# EAGLE board 2013-09-26-antonio-feed-support-box-control-v1_0 (EAGLE 6.5.0), part 1 of 2
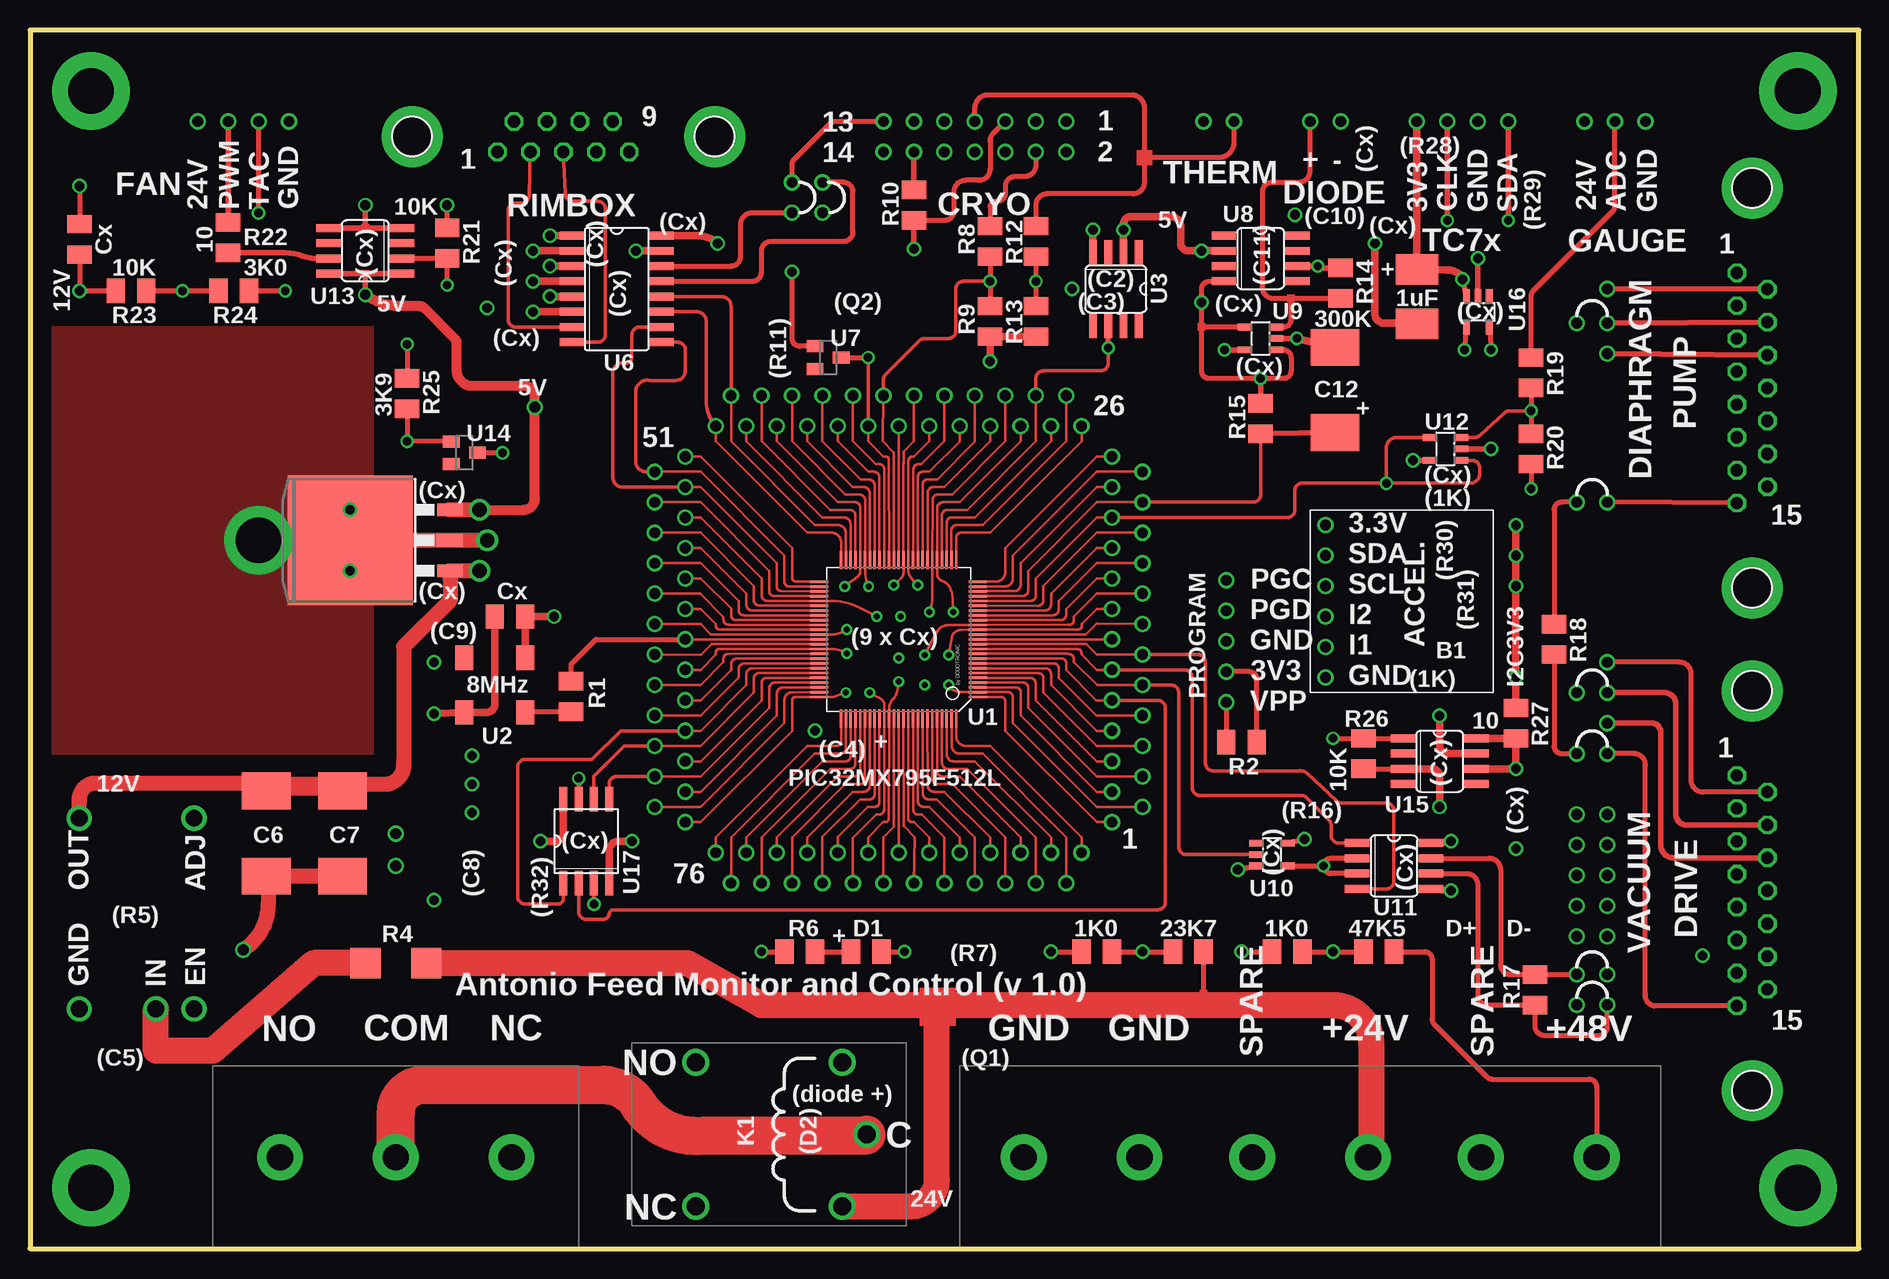
[diagram p0: board, top side]
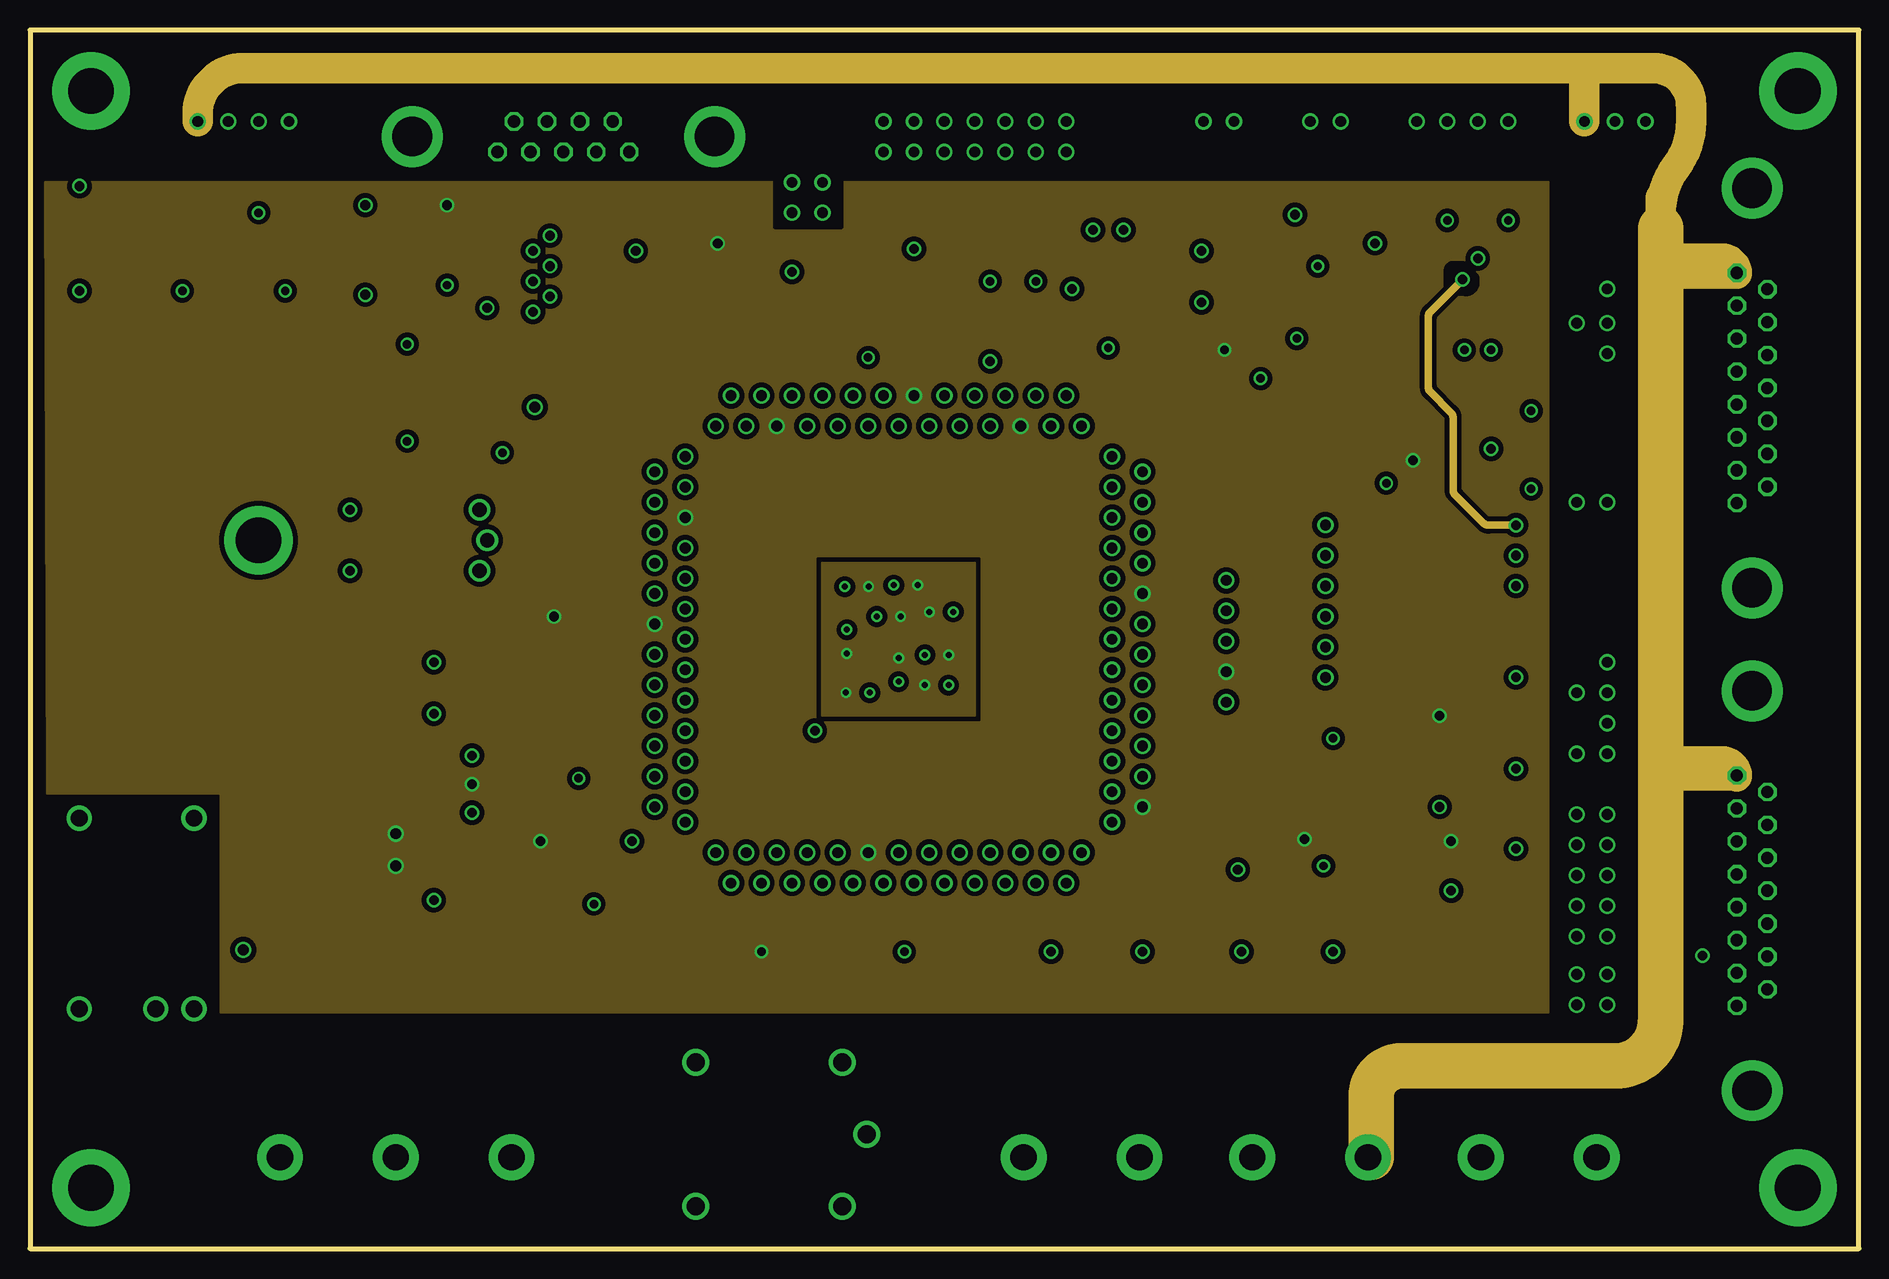
[diagram p1: board, inner layer Route2]
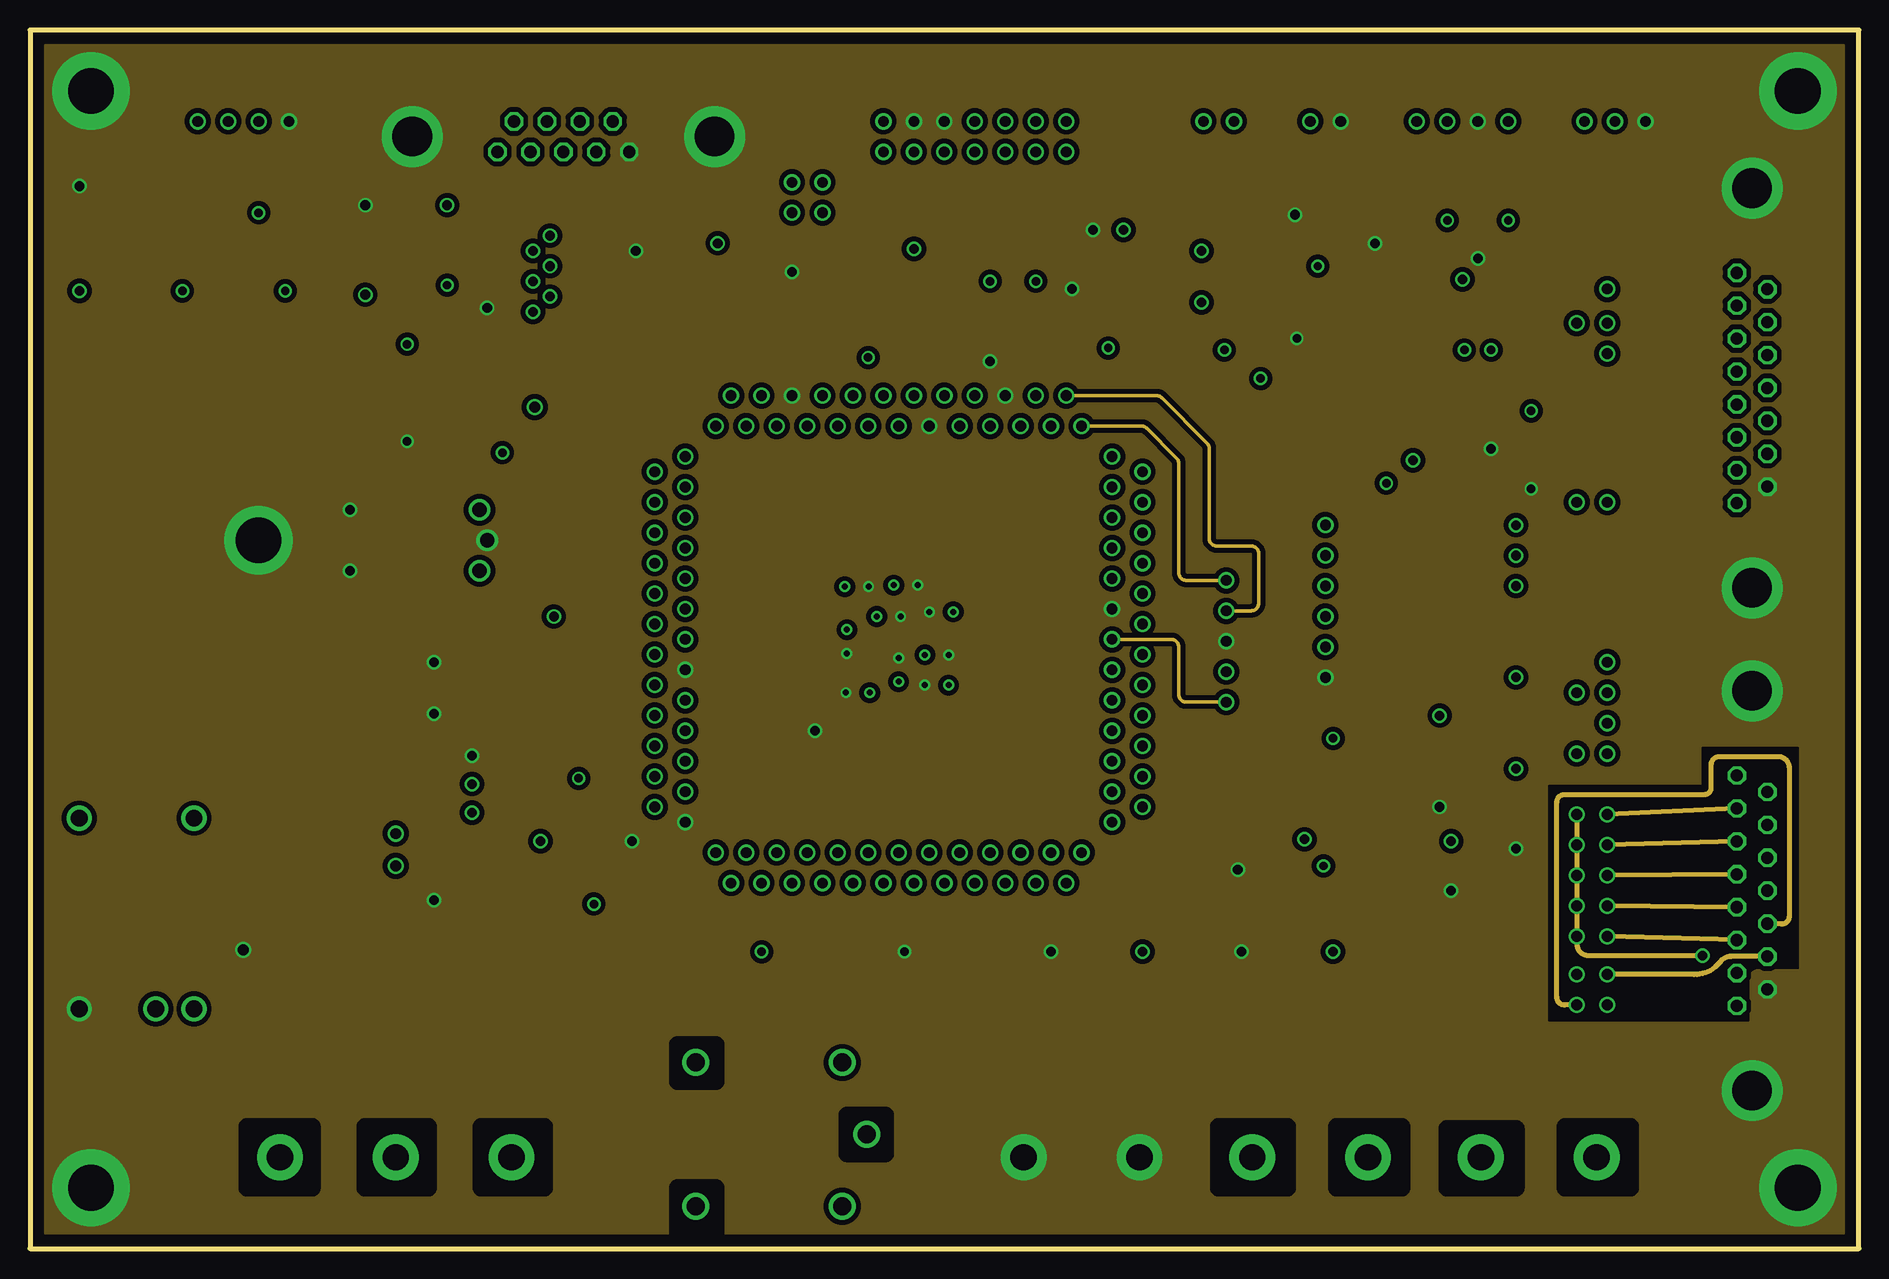
[diagram p2: board, inner layer Route15]
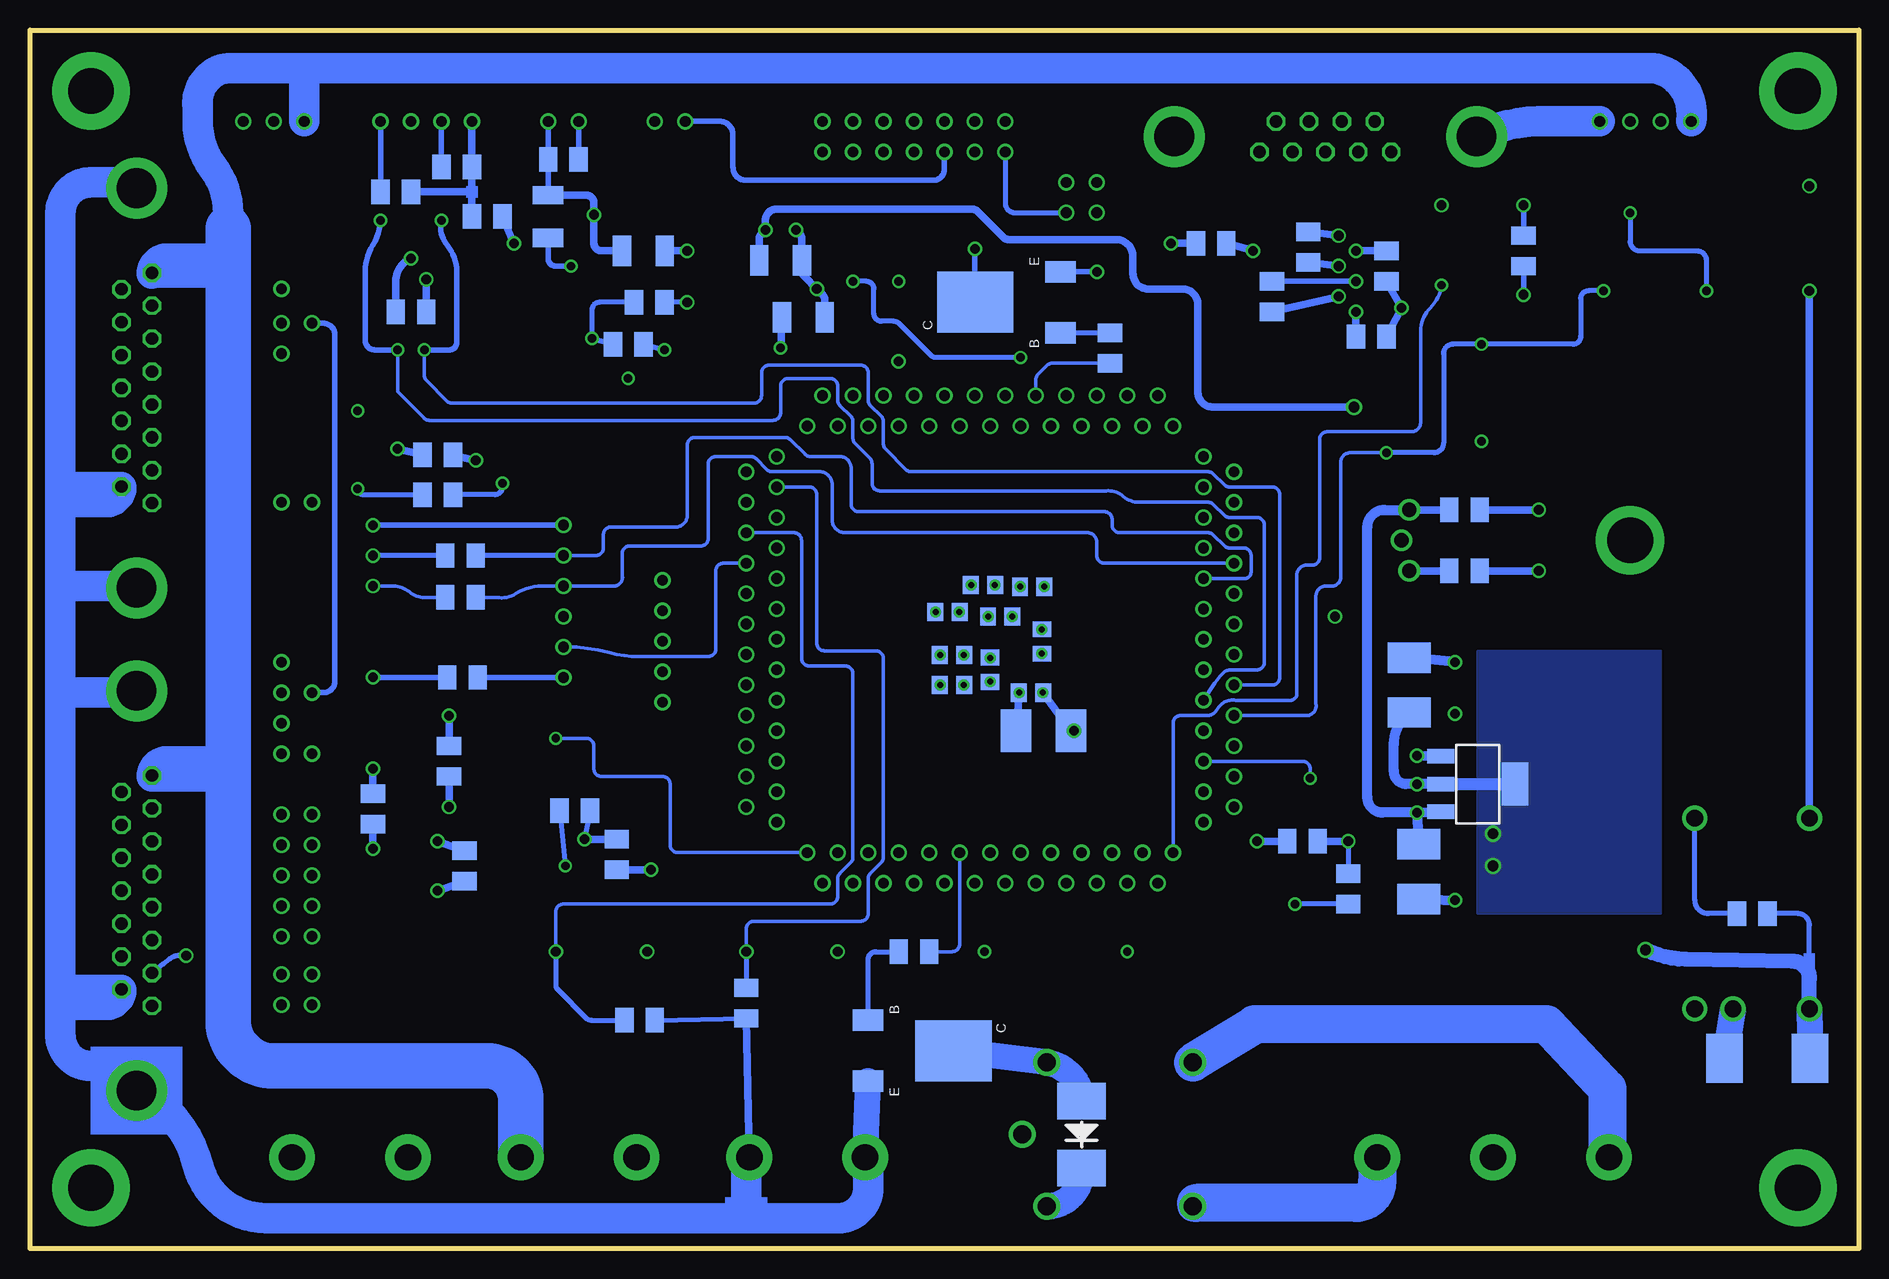
[diagram p3: board, bottom side, seen from below]

Size 152.4 x 101.6 mm. Coordinates in mm from the lower left corner, seen from the top.
Outline: 0,0 152.4,0 152.4,101.6 0,101.6 0,0
Copper layers (1+2*15+16): Top 0.0178mm / dielectric 12mil / Route2 0.0356mm / dielectric 28mil / Route15 0.0356mm / dielectric 12mil / Bottom 0.0178mm
Design rules "SSC-EAGLE-4Lyr_v1.0.0.3": minimum track width 6mil, minimum drill 8mil, track to track 6mil, track to pad 6mil, pad to pad 6mil, via to via 6mil, smd to smd 6mil, copper to edge 20mil, drill to drill 16mil, minimum pad ring 8mil, minimum via ring 8mil, stop-mask expansion 3mil, vias tented up to drill 0mil, thermal gap 10mil

## Footprints (pad centres in the part's own frame; a part is rotated, then mirrored left to right if it is on the bottom)
G5LE14RELAY = drill 1.5: P$1 -6.096,5.994; P$2 -6.096,-5.994; P$3 6.096,-5.994; P$4 6.096,5.994; P$5 -8.128,0
STANDARDMOUNTINGHOLE = drill 3.81 pad 6.452: P$1 0,0
D15 = drill 1.016 octagon: 1 -9.601,-1.27; 2 -6.858,-1.27; 3 -4.115,-1.27; 4 -1.372,-1.27; 5 1.372,-1.27; 6 4.115,-1.27; 7 6.858,-1.27; 8 9.601,-1.27; 9 -8.23,1.27; 10 -5.486,1.27; 11 -2.743,1.27; 12 0,1.27; 13 2.743,1.27; 14 5.486,1.27; 15 8.23,1.27 | drill 3.302 pad 5.08: G1 -16.662,0; G2 16.662,0
2X7HEADER = drill 0.9: P$1 0,1.27; P$2 0,-1.27; P$3 -2.54,-1.27; P$4 -2.54,1.27; P$5 -5.08,1.27; P$6 -5.08,-1.27; P$7 -7.62,-1.27; P$8 -7.62,1.27; P$9 2.54,1.27; P$10 2.54,-1.27; P$11 5.08,-1.27; P$12 5.08,1.27; P$13 7.62,1.27; P$14 7.62,-1.27
DB9 = drill 1.016 octagon: 3 -4.115,-1.27; 4 -1.372,-1.27; 5 1.372,-1.27; 6 4.115,-1.27; 10 -5.486,1.27; 11 -2.743,1.27; 12 0,1.27; 13 2.743,1.27; 14 5.486,1.27 | drill 3.302 pad 5.08: G1 -12.598,0; G2 12.598,0
1X4HEADER = drill 0.9: P$1 1.27,0; P$2 -1.27,0; P$3 -3.81,0; P$4 3.81,0
1X2HEADER = drill 0.9: P$1 -1.27,0; P$2 1.27,0
1X3HEADER = drill 0.9: P$1 0,0; P$2 -2.54,0; P$3 2.54,0
1X3BARRIER = drill 2.2 pad 3.81: P$1 0,0; P$2 9.652,0; P$3 -9.652,0
1X6BARRIER = drill 2.2 pad 3.81: P$1 4.826,0; P$2 -4.826,0; P$3 -14.224,0; P$4 -23.876,0; P$5 14.224,0; P$6 23.876,0
TQFP100_12X12 = smd 0.2 x 1.5: 1 -4.8,-6.6; 2 -4.4,-6.6; 3 -4,-6.6; 4 -3.6,-6.6; 5 -3.2,-6.6; 6 -2.8,-6.6; 7 -2.4,-6.6; 8 -2,-6.6; 9 -1.6,-6.6; 10 -1.2,-6.6; 11 -0.8,-6.6; 12 -0.4,-6.6; 13 0,-6.6; 14 0.4,-6.6; 15 0.8,-6.6; 16 1.2,-6.6; 17 1.6,-6.6; 18 2,-6.6; 19 2.4,-6.6; 20 2.8,-6.6; 21 3.2,-6.6; 22 3.6,-6.6; 23 4,-6.6; 24 4.4,-6.6; 25 4.8,-6.6; 51 4.8,6.6; 52 4.4,6.6; 53 4,6.6; 54 3.6,6.6; 55 3.2,6.6; 56 2.8,6.6; 57 2.4,6.6; 58 2,6.6; 59 1.6,6.6; 60 1.2,6.6; 61 0.8,6.6; 62 0.4,6.6; 63 0,6.6; 64 -0.4,6.6; 65 -0.8,6.6; 66 -1.2,6.6; 67 -1.6,6.6; 68 -2,6.6; 69 -2.4,6.6; 70 -2.8,6.6; 71 -3.2,6.6; 72 -3.6,6.6; 73 -4,6.6; 74 -4.4,6.6; 75 -4.8,6.6 | smd 1.5 x 0.2: 26 6.6,-4.8; 27 6.6,-4.4; 28 6.6,-4; 29 6.6,-3.6; 30 6.6,-3.2; 31 6.6,-2.8; 32 6.6,-2.4; 33 6.6,-2; 34 6.6,-1.6; 35 6.6,-1.2; 36 6.6,-0.8; 37 6.6,-0.4; 38 6.6,0; 39 6.6,0.4; 40 6.6,0.8; 41 6.6,1.2; 42 6.6,1.6; 43 6.6,2; 44 6.6,2.4; 45 6.6,2.8; 46 6.6,3.2; 47 6.6,3.6; 48 6.6,4; 49 6.6,4.4; 50 6.6,4.8; 76 -6.6,4.8; 77 -6.6,4.4; 78 -6.6,4; 79 -6.6,3.6; 80 -6.6,3.2; 81 -6.6,2.8; 82 -6.6,2.4; 83 -6.6,2; 84 -6.6,1.6; 85 -6.6,1.2; 86 -6.6,0.8; 87 -6.6,0.4; 88 -6.6,0; 89 -6.6,-0.4; 90 -6.6,-0.8; 91 -6.6,-1.2; 92 -6.6,-1.6; 93 -6.6,-2; 94 -6.6,-2.4; 95 -6.6,-2.8; 96 -6.6,-3.2; 97 -6.6,-3.6; 98 -6.6,-4; 99 -6.6,-4.4; 100 -6.6,-4.8
PTN78000 = drill 1.4: P$1 7.95,4.775; P$2 7.95,-4.775; P$3 -7.95,-4.775; P$4 -7.95,4.775; P$5 -7.95,-1.6
RESISTORHALFWSMD = smd 2.54 x 2.54: P$1 -2.54,0; P$2 2.54,0
CAP100UF = smd 3.048 x 4.064: P$1 -3.556,0; P$2 3.556,0
SO08 = smd 0.66 x 2.032: 1 -1.905,-3.073; 2 -0.635,-3.073; 3 0.635,-3.073; 4 1.905,-3.073; 5 1.905,3.073; 6 0.635,3.073; 7 -0.635,3.073; 8 -1.905,3.073
VIA31 = drill 0.8: P$1 0,0
SO16-F = smd 0.66 x 2.032: 1 -4.445,-3.748; 2 -3.175,-3.748; 3 -1.905,-3.748; 4 -0.635,-3.748; 5 0.635,-3.748; 6 1.905,-3.748; 7 3.175,-3.748; 8 4.445,-3.748; 9 4.445,3.748; 10 3.175,3.748; 11 1.905,3.748; 12 0.635,3.748; 13 -0.635,3.748; 14 -1.905,3.748; 15 -3.175,3.748; 16 -4.445,3.748
TO263-3 = smd 1.067 x 2.159: 1 -2.54,-5.791; 2 0,-5.791; 3 2.54,-5.791 | smd 10.8 x 10.41: TAB 0,2.54
SOT223 = smd 1.219 x 2.235: 1 -2.311,-3.099; 2 0,-3.099; 3 2.311,-3.099 | smd 3.6 x 2.2: 4 0,3.099
OSCSMD8X5 = smd 2.032 x 1.524: P$1 2.286,2.54; P$2 -2.286,2.54; P$3 -2.286,-2.54; P$4 2.286,-2.54
SMD0805 = smd 2.032 x 1.524: P$1 0,1.27; P$2 0,-1.27
2X5HEADER = drill 0.9: P$1 0,-1.27; P$2 -2.54,-1.27; P$3 -5.08,-1.27; P$4 2.54,-1.27; P$5 5.08,-1.27; P$6 -5.08,1.27; P$7 -2.54,1.27; P$8 0,1.27; P$9 2.54,1.27; P$10 5.08,1.27
SO08-208 = smd 0.66 x 2.032: 1 -1.905,-3.498; 2 -0.635,-3.498; 3 0.635,-3.498; 4 1.905,-3.498; 5 1.905,3.498; 6 0.635,3.498; 7 -0.635,3.498; 8 -1.905,3.498
SOT23-5 = smd 0.55 x 1.2: 1 -0.95,-1.3; 2 0,-1.3; 3 0.95,-1.3; 4 0.95,1.3; 5 -0.95,1.3
SOT23 = smd 1 x 1.4: 1 -0.95,-1.1; 2 0.95,-1.1; 3 0,1.1
DPAK = smd 5.08 x 6.35: P$1 0,4.572 | smd 1.778 x 2.54: P$2 -2.54,-2.54; P$3 2.54,-2.54
ACCELBRD = drill 0.9: P$1 -6.35,6.35; P$2 -6.35,3.81; P$3 -6.35,1.27; P$4 -6.35,-1.27; P$5 -6.35,-3.81; P$6 -6.35,-6.35
0805WVIA = drill 0.5: P$1 0.991,0; P$2 -0.991,0 | smd 1.321 x 1.524: P$3 -1.016,0; P$4 1.016,0
PIC32PRMTR = drill 0.9: P$1 0,0; P$2 -2.54,0; P$3 -5.08,0; P$4 -7.62,0; P$5 -10.16,0; P$6 -12.7,0; P$7 -15.24,0; P$8 2.54,0; P$9 5.08,0; P$10 7.62,0; P$11 10.16,0; P$12 12.7,0; P$13 15.24,0; P$14 -13.97,2.54; P$15 -11.43,2.54; P$16 -8.89,2.54; P$17 -6.35,2.54; P$18 -3.81,2.54; P$19 -1.27,2.54; P$20 1.27,2.54; P$21 3.81,2.54; P$22 6.35,2.54; P$23 8.89,2.54; P$24 11.43,2.54; P$25 13.97,2.54
1X5HEADER = drill 0.9: P$1 0,0; P$2 -2.54,0; P$3 -5.08,0; P$4 2.54,0; P$5 5.08,0
CAP10UFMIN = smd 2.54 x 3.556: P$1 -2.286,0; P$2 2.286,0
SILICONDIODESMB = smd 4.064 x 3.048: P$1 0,2.794; P$2 0,-2.794
VIA35 = drill 0.9: P$1 0,0
2X2HEADER = drill 0.9: P$1 -1.27,1.27; P$2 1.27,1.27; P$3 1.27,-1.27; P$4 -1.27,-1.27
VIA29 = drill 0.7: P$1 0,0
CAP1UF = smd 1.524 x 2.54: P$3 -1.778,0; P$4 1.778,0

## Placement (x,y rotation side)
E$1  [G5LE14RELAY]  61.59,9.53 180 top
E$2  [STANDARDMOUNTINGHOLE]  147.32,5.08 0 top
E$3  [STANDARDMOUNTINGHOLE]  147.32,96.52 0 top
E$4  [STANDARDMOUNTINGHOLE]  5.08,96.52 0 top
E$5  [D15]  143.51,29.84 270 top
E$6  [D15]  143.51,71.75 270 top
E$7  [2X7HEADER]  78.74,92.71 0 top
E$8  [DB9]  44.45,92.71 180 top
E$9  [1X4HEADER]  17.78,93.98 0 top
E$10  [1X4HEADER]  119.38,93.98 0 top
E$11  [1X2HEADER]  99.06,93.98 0 top
E$12  [1X2HEADER]  107.95,93.98 0 top
E$13  [1X3HEADER]  132.08,93.98 0 top
E$14  [1X3BARRIER]  30.48,7.62 0 top
E$15  [1X6BARRIER]  106.68,7.62 0 top
E$16  [TQFP100_12X12]  72.39,50.8 90 top
E$17  [PTN78000]  8.89,27.94 90 top
E$18  [RESISTORHALFWSMD]  30.48,23.81 0 top
E$19  [CAP100UF]  7.62,15.88 0 bottom
E$20  [SO08]  27.94,83.19 90 top
E$21  [VIA31]  43.34,84.45 0 top
E$22  [SO16-F]  48.9,80.01 270 top
E$23  [TO263-3]  29.21,59.05 90 top
E$24  [SOT223]  31.75,38.73 270 bottom
E$25  [OSCSMD8X5]  38.73,46.99 270 top
E$26  [CAP100UF]  19.68,34.61 90 top
E$27  [SMD0805]  40.01,52.7 270 top
E$28  [SMD0805]  45.09,46.04 0 top
E$29  [2X5HEADER]  130.18,31.11 90 top
E$30  [SO08-208]  46.35,33.97 0 top
E$31  [SO08]  117.47,40.64 270 top
E$32  [SOT23-5]  117.95,66.67 90 top
E$33  [SOT23]  36.2,66.36 270 top
E$34  [SOT23-5]  103.5,32.86 270 top
E$35  [SO08]  113.67,31.91 270 top
E$36  [SO08]  102.55,82.55 270 top
E$37  [SOT23-5]  102.55,75.88 90 top
E$38  [SO08]  90.49,80.01 180 top
E$39  [SOT23-5]  120.65,78.11 180 top
E$40  [SOT23]  66.52,74.3 270 top
E$41  [DPAK]  69.06,78.9 90 bottom
E$42  [DPAK]  80.01,16.51 270 bottom
E$43  [ACCELBRD]  114.3,53.98 0 top
E$44  [0805WVIA]  75.95,53.09 180 bottom
E$45  [0805WVIA]  75.56,46.99 0 bottom
E$46  [0805WVIA]  75.56,49.5 0 bottom
E$47  [0805WVIA]  72.39,48.26 90 bottom
E$48  [0805WVIA]  72.97,55.32 0 bottom
E$49  [0805WVIA]  68.88,55.19 0 bottom
E$50  [0805WVIA]  71.55,52.7 0 bottom
E$51  [PIC32PRMTR]  72.39,68.58 0 top
E$52  [0805WVIA]  68.99,46.35 0 bottom
E$53  [PIC32PRMTR]  90.17,50.8 270 top
E$54  [0805WVIA]  68.07,50.62 90 bottom
E$55  [PIC32PRMTR]  54.61,50.8 90 top
E$56  [PIC32PRMTR]  72.39,33.02 180 top
E$57  [PIC32PRMTR]  72.39,68.58 0 top
E$58  [PIC32PRMTR]  54.61,50.8 90 top
E$59  [PIC32PRMTR]  72.39,33.02 180 top
E$60  [1X5HEADER]  99.69,50.64 90 top
E$61  [CAP10UFMIN]  67.94,43.18 0 bottom
E$62  [SILICONDIODESMB]  64.77,9.53 0 bottom
E$63  [SMD0805]  78.74,24.77 90 bottom
E$64  [CAP100UF]  26.04,34.61 90 top
E$65  [VIA35]  131.44,80.01 0 top
E$66  [VIA35]  131.44,77.15 0 top
E$67  [VIA35]  131.44,74.61 0 top
E$68  [VIA35]  131.44,62.23 0 top
E$69  [VIA35]  131.44,41.27 0 top
E$70  [VIA35]  131.44,43.81 0 top
E$71  [VIA35]  131.44,46.35 0 top
E$72  [VIA35]  131.44,48.9 0 top
E$73  [VIA35]  128.91,62.23 0 top
E$74  [VIA35]  128.91,77.15 0 top
E$75  [VIA35]  128.91,41.27 0 top
E$76  [VIA35]  128.91,46.35 0 top
E$77  [SMD0805]  127,50.8 0 top
E$78  [2X2HEADER]  130.18,21.59 0 top
E$79  [SMD0805]  88.9,24.77 90 top
E$80  [SMD0805]  96.52,24.77 90 top
E$81  [SMD0805]  104.78,24.77 90 top
E$82  [SMD0805]  112.39,24.77 90 top
E$83  [VIA31]  92.71,24.77 0 top
E$84  [VIA31]  108.58,24.77 0 top
E$85  [VIA31]  85.09,24.77 0 top
E$86  [VIA31]  100.97,24.77 0 top
E$87  [SMD0805]  125.41,21.59 0 top
E$88  [VIA31]  139.38,24.45 0 top
E$89  [VIA31]  118.43,29.84 0 top
E$90  [VIA31]  118.43,33.97 0 top
E$91  [SMD0805]  116.2,31.91 0 bottom
E$92  [VIA29]  107.79,31.91 0 top
E$93  [VIA31]  106.2,34.13 0 top
E$94  [VIA31]  100.65,31.59 0 top
E$95  [SMD0805]  103.5,32.86 0 bottom
E$96  [SMD0805]  107,36.51 270 bottom
E$97  [SMD0805]  116.84,90.17 90 bottom
E$98  [SMD0805]  121.92,88.11 90 bottom
E$99  [VIA31]  120.65,82.55 0 top
E$100  [SMD0805]  114.3,86.04 90 bottom
E$101  [VIA29]  119.54,74.93 0 top
E$102  [VIA29]  121.76,74.93 0 top
E$103  [VIA31]  119.38,80.8 0 top
E$104  [CAP10UFMIN]  115.57,79.38 90 top
E$105  [VIA31]  112.08,83.82 0 top
E$106  [SMD0805]  120.65,78.11 90 bottom
E$107  [VIA29]  123.19,85.72 0 top
E$108  [VIA29]  118.11,85.72 0 top
E$109  [SMD0805]  111.12,41.27 0 top
E$110  [SMD0805]  123.83,43.81 0 top
E$111  [SMD0805]  92.71,20.48 0 bottom
E$112  [SMD0805]  123.83,36.67 0 bottom
E$113  [VIA31]  123.83,40.01 0 top
E$114  [VIA31]  123.83,33.34 0 top
E$115  [SMD0805]  117.47,40.64 0 bottom
E$116  [VIA31]  117.47,44.45 0 top
E$117  [VIA31]  117.47,36.83 0 top
E$118  [VIA31]  123.83,60.33 0 top
E$119  [VIA31]  123.83,57.78 0 top
E$120  [VIA31]  123.83,55.24 0 top
E$121  [SMD0805]  125.09,73.03 0 top
E$122  [SMD0805]  125.09,66.67 0 top
E$123  [SMD0805]  118.43,66.2 270 bottom
E$124  [VIA29]  125.09,63.34 0 top
E$125  [VIA29]  125.09,69.85 0 top
E$126  [VIA31]  121.76,66.67 0 top
E$127  [VIA31]  115.25,65.72 0 top
E$128  [VIA29]  113.03,63.82 0 top
E$129  [VIA31]  36.83,41.12 0 top
E$130  [VIA31]  36.83,38.73 0 top
E$131  [VIA31]  36.83,36.35 0 top
E$132  [CAP10UFMIN]  37.47,46.99 90 bottom
E$133  [CAP10UFMIN]  36.67,31.43 90 bottom
E$134  [VIA31]  33.66,44.61 0 top
E$135  [VIA31]  43.66,52.7 0 top
E$136  [VIA29]  46.99,28.73 0 top
E$137  [SMD0805]  42.55,30 180 bottom
E$138  [SMD0805]  46.35,33.97 270 bottom
E$139  [VIA31]  42.55,33.97 0 top
E$140  [VIA31]  50.16,33.97 0 top
E$141  [CAP100UF]  108.74,71.6 90 top
E$142  [VIA29]  45.72,39.21 0 top
E$143  [SMD0805]  8.89,27.94 90 bottom
E$144  [VIA35]  17.78,24.92 0 top
E$145  [VIA31]  33.66,48.9 0 top
E$146  [VIA31]  33.66,29.05 0 top
E$147  [SMD0805]  16.51,84.3 180 top
E$148  [SMD0805]  34.77,83.82 0 top
E$149  [SMD0805]  27.94,83.19 0 bottom
E$150  [VIA31]  27.94,87 0 top
E$151  [VIA31]  27.94,79.53 0 top
E$152  [VIA31]  34.77,87 0 top
E$153  [VIA29]  34.77,80.33 0 top
E$154  [SMD0805]  8.41,79.85 90 top
E$155  [SMD0805]  16.99,79.85 90 top
E$156  [SMD0805]  31.43,71.28 180 top
E$157  [VIA29]  21.27,79.85 0 top
E$158  [VIA29]  12.7,79.85 0 top
E$159  [VIA29]  19.05,86.36 0 top
E$160  [VIA29]  31.43,67.31 0 top
E$161  [VIA31]  4.13,79.85 0 top
E$162  [VIA29]  39.37,66.36 0 top
E$163  [VIA29]  31.43,75.41 0 top
E$164  [SMD0805]  4.13,84.14 0 top
E$165  [VIA31]  4.13,88.58 0 top
E$166  [VIA31]  43.34,81.92 0 top
E$167  [VIA31]  43.34,79.38 0 top
E$168  [VIA31]  41.91,83.19 0 top
E$169  [VIA31]  41.91,80.64 0 top
E$170  [VIA31]  41.91,78.11 0 top
E$171  [VIA31]  50.48,83.19 0 top
E$172  [VIA31]  57.31,83.82 0 top
E$173  [SMD0805]  53.98,83.82 90 bottom
E$174  [2X2HEADER]  64.77,87.63 0 top
E$175  [SMD0805]  62.39,75.09 0 bottom
E$176  [SMD0805]  73.66,87 180 top
E$177  [SMD0805]  80.01,83.98 0 top
E$178  [SMD0805]  80.01,77.31 180 top
E$179  [VIA31]  63.5,81.44 0 top
E$180  [VIA31]  73.66,83.34 0 top
E$181  [VIA29]  80.01,80.64 0 top
E$182  [VIA31]  80.01,73.98 0 top
E$183  [SMD0805]  83.82,83.98 0 top
E$184  [SMD0805]  83.82,77.31 0 top
E$185  [VIA31]  91.12,84.93 0 top
E$186  [VIA29]  83.82,80.64 0 top
E$187  [VIA29]  69.85,74.3 0 top
E$188  [VIA31]  88.58,84.93 0 top
E$189  [CAP1UF]  89.85,82.39 0 bottom
E$190  [CAP1UF]  87.95,77.63 0 bottom
E$191  [VIA29]  89.85,75.09 0 top
E$192  [VIA35]  42.07,70.17 0 top
E$193  [SMD0805]  107.95,90.81 90 bottom
E$194  [CAP1UF]  109.22,86.04 90 bottom
E$195  [VIA29]  107.31,81.92 0 top
E$196  [SMD0805]  109.22,80.49 0 top
E$197  [VIA29]  105.57,75.88 0 top
E$198  [VIA29]  99.54,74.93 0 top
E$199  [SMD0805]  102.55,75.41 90 bottom
E$200  [VIA29]  102.55,72.55 0 top
E$201  [VIA31]  97.63,83.19 0 top
E$202  [CAP1UF]  101.28,83.19 180 bottom
E$203  [VIA31]  105.41,86.2 0 top
E$204  [VIA31]  97.63,78.9 0 top
E$205  [SMD0805]  100.81,78.9 90 bottom
E$206  [SMD0805]  102.55,69.22 0 top
E$207  [VIA29]  108.58,42.55 0 top
E$208  [SMD0805]  118.43,62.87 90 bottom
E$209  [SMD0805]  116.52,57.78 90 bottom
E$210  [SMD0805]  116.52,54.29 90 bottom
E$211  [VIA29]  60.96,24.77 0 top
E$212  [VIA29]  72.87,24.77 0 top
E$213  [SMD0805]  64.14,24.77 90 top
E$214  [SMD0805]  69.69,24.77 90 top
E$215  [SMD0805]  100.97,42.23 90 top
E$216  [VIA31]  86.84,80.01 0 top
E$217  [SMD0805]  32.86,61.59 90 bottom
E$218  [SMD0805]  32.86,56.52 90 bottom
E$219  [SMD0805]  48.9,79.38 0 bottom
E$220  [SMD0805]  39.37,81.92 0 bottom
E$221  [SMD0805]  40.64,76.04 90 bottom
E$222  [SMD0805]  45.88,83.5 0 bottom
E$223  [VIA31]  38.1,78.42 0 top
E$224  [SMD0805]  101.6,19.05 90 bottom
E$225  [VIA31]  123.83,47.62 0 top
E$226  [SMD0805]  116.36,47.62 90 bottom
GND  [STANDARDMOUNTINGHOLE]  5.08,5.08 0 top

## Library data of the parts
E$1-E$15 E$17-E$19 E$21 E$25-E$29 E$41-E$226 GND = rfa
E$16 = DodoMicroR3
E$20 E$30 E$31 E$35 E$36 E$38 = maxim
E$22 E$23 = linear
E$24 = transistor-pnp
E$32 E$34 E$37 E$39 = analog-devices
E$33 E$40 = led

## Nets
GND: E$2.P$1 E$3.P$1 E$4.P$1 E$5.15 E$5.G1 E$5.G2 E$6.15 E$6.G1 E$6.G2 E$7.P$4 E$7.P$5 E$8.10 E$8.G1 E$8.G2 E$9.P$4 E$10.P$1 E$12.P$2 E$13.P$3 E$15.P$3 E$15.P$4 E$16.15 E$16.31 E$16.36 E$16.45 E$16.65 E$16.75 E$17.P$4 E$19.P$2 E$20.4 E$20.5 E$22.15 E$23.2 E$23.TAB E$24.1 E$25.P$4 E$26.P$1 E$27.P$2 E$30.4 E$31.3 E$32.2 E$33.1 E$34.3 E$35.5 E$37.2 E$38.4 E$39.2 E$40.1 E$41.P$3 E$42.P$3 E$43.P$6 E$44.P$2 E$45.P$1 E$46.P$2 E$47.P$1 E$48.P$2 E$49.P$2 E$50.P$2 E$51.P$8 E$51.P$16 E$51.P$23 E$52.P$1 E$53.P$2 E$54.P$2 E$55.P$2 E$55.P$7 E$57.P$8 E$57.P$16 E$57.P$23 E$58.P$2 E$58.P$7 E$60.P$1 E$61.P$2 E$64.P$1 E$79.P$1 E$81.P$1 E$85.P$1 E$86.P$1 E$89.P$1 E$91.P$2 E$94.P$1 E$95.P$2 E$99.P$1 E$100.P$2 E$104.P$1 E$105.P$1 E$106.P$1 E$109.P$2 E$111.P$2 E$112.P$2 E$114.P$1 E$115.P$2 E$117.P$1 E$122.P$2 E$123.P$2 E$124.P$1 E$126.P$1 E$129.P$1 E$132.P$2 E$133.P$1 E$134.P$1 E$138.P$2 E$140.P$1 E$141.P$2 E$143.P$2 E$144.P$1 E$145.P$1 E$146.P$1 E$149.P$1 E$150.P$1 E$156.P$1 E$160.P$1 E$164.P$1 E$165.P$1 E$171.P$1 E$173.P$2 E$178.P$1 E$179.P$1 E$182.P$1 E$184.P$2 E$188.P$1 E$189.P$4 E$190.P$4 E$193.P$1 E$194.P$4 E$197.P$1 E$199.P$1 E$202.P$4 E$203.P$1 E$205.P$1 E$208.P$1 E$212.P$1 E$214.P$2 E$216.P$1 E$217.P$2 E$218.P$2 E$220.P$2 E$221.P$2 E$223.P$1 E$224.P$2 E$226.P$2 GND.P$1
S$1: E$6.9 E$65.P$1
S$2: E$16.25 E$53.P$7
S$3: E$16.24 E$53.P$14
S$4: E$16.23 E$53.P$6 E$79.P$2 E$80.P$1 E$83.P$1 E$111.P$1
S$5: E$16.22 E$53.P$15 E$141.P$1 E$206.P$2
S$6: E$16.21 E$53.P$5 E$128.P$1 E$208.P$2
S$7: E$16.20 E$53.P$16 E$81.P$2 E$82.P$1 E$84.P$1 E$224.P$1
S$8: E$16.19 E$53.P$4
S$9: E$16.18 E$43.P$5 E$53.P$17
S$10: E$16.17 E$53.P$3
S$11: E$16.14 E$53.P$19
S$12: E$57.P$25
S$13: E$57.P$2
S$14: E$57.P$18
S$15: E$57.P$1
S$16: E$57.P$13
S$17: E$57.P$12
S$18: E$57.P$24
S$20: E$42.P$2 E$63.P$1
S$21: E$57.P$10
S$22: E$57.P$22
S$23: E$57.P$9
S$24: E$57.P$21
S$25: E$6.8 E$68.P$1
S$27: E$57.P$7
S$28: E$57.P$14
S$29: E$57.P$6
S$30: E$57.P$15
S$32: E$6.10 E$66.P$1
S$33: E$57.P$4
S$34: E$57.P$17
S$35: E$57.P$3
S$36: E$57.P$19
S$37: E$58.P$25
S$38: E$6.11 E$67.P$1
S$39: E$58.P$18
S$40: E$58.P$1
S$41: E$58.P$13
S$42: E$58.P$12
S$43: E$58.P$24
S$45: E$58.P$23
S$46: E$58.P$10
S$47: E$58.P$22
S$48: E$58.P$9
S$49: E$58.P$21
S$50: E$58.P$8
S$52: E$5.8 E$69.P$1
S$53: E$16.74 E$58.P$14
S$54: E$58.P$6
S$55: E$58.P$15
S$56: E$58.P$5
S$57: E$58.P$16
S$58: E$58.P$4
S$59: E$58.P$17
S$60: E$58.P$3
S$61: E$58.P$19
S$62: E$59.P$25
S$63: E$59.P$2
S$64: E$59.P$18
S$65: E$59.P$1
S$66: E$59.P$13
S$67: E$59.P$12
S$68: E$59.P$24
S$69: E$59.P$11
S$70: E$59.P$23
S$71: E$59.P$10
S$72: E$59.P$22
S$73: E$59.P$9
S$74: E$16.85 E$52.P$2 E$59.P$21 E$61.P$1
S$76: E$16.13 E$53.P$1 E$60.P$3 E$215.P$1
S$77: E$16.3 E$53.P$12
S$78: E$16.4 E$53.P$24
S$79: E$16.5 E$53.P$11
S$80: E$16.6 E$53.P$23
S$81: E$16.7 E$53.P$10
S$82: E$16.8 E$53.P$22
S$84: E$16.10 E$34.2 E$53.P$21
S$85: E$16.1 E$53.P$13
S$86: E$16.11 E$35.1 E$53.P$8
S$88: E$16.12 E$35.4 E$53.P$20
S$89: E$5.9 E$72.P$1
S$90: E$5.10 E$71.P$1
S$91: E$59.P$20
S$92: E$59.P$7
S$93: E$59.P$14
S$94: E$59.P$6
S$95: E$59.P$15
S$96: E$59.P$5
S$97: E$59.P$16
S$98: E$59.P$4
S$99: E$59.P$17
S$100: E$59.P$3
S$101: E$5.11 E$70.P$1
S$102: E$74.P$1 E$76.P$1
S$103: E$73.P$1 E$77.P$1
S$104: E$75.P$1 E$77.P$2
S$105: E$5.2 E$29.P$5
S$106: E$5.3 E$29.P$4
S$107: E$5.4 E$29.P$1
S$108: E$1.P$4 E$14.P$2
S$109: E$1.P$5 E$14.P$1
S$110: E$51.P$13 E$60.P$5
S$111: E$1.P$3
S$112: E$17.P$5 E$18.P$1 E$19.P$1
S$114: E$28.P$1 E$55.P$1
S$115: E$59.P$19
S$116: E$1.P$2 E$42.P$1 E$62.P$1
S$117: E$5.5 E$29.P$2
S$118: E$5.6 E$29.P$3
S$119: E$5.7 E$29.P$6 E$29.P$7 E$29.P$8 E$29.P$9 E$29.P$10 E$88.P$1
S$120: E$5.14 E$78.P$2
S$121: E$22.6 E$170.P$1 E$221.P$1
S$122: E$5.13 E$78.P$4
S$124: E$35.7 E$78.P$1 E$87.P$1
S$125: E$35.6 E$78.P$3 E$87.P$2
S$126: E$225.P$1 E$226.P$1
S$129: E$190.P$3 E$191.P$1
S$130: E$15.P$6 E$82.P$2
S$131: E$10.P$2 E$39.4 E$55.P$18 E$97.P$1 E$101.P$1 E$108.P$1
S$132: E$10.P$4 E$39.5 E$55.P$3 E$98.P$1 E$102.P$1 E$107.P$1
S$136: E$13.P$1 E$121.P$1
S$138: E$51.P$19 E$177.P$2 E$178.P$2 E$181.P$1
S$142: E$30.3 E$136.P$1 E$137.P$1
S$145: E$213.P$2 E$214.P$1
S$146: E$51.P$25 E$60.P$4
S$147: E$32.1 E$32.4
S$148: E$16.9 E$30.2 E$53.P$9
S$149: E$30.5 E$55.P$15
S$150: E$30.6 E$55.P$16
S$151: E$30.7 E$55.P$5 E$142.P$1
S$152: E$30.1 E$55.P$4
S$153: E$17.P$2 E$143.P$1
S$154: E$22.2 E$168.P$1 E$220.P$1
S$155: E$21.P$1 E$22.1 E$222.P$1
S$156: E$25.P$1 E$28.P$2
S$159: E$20.2 E$56.P$13 E$148.P$2 E$153.P$1
S$160: E$33.3 E$55.P$17 E$155.P$2 E$156.P$2 E$157.P$1 E$162.P$1 E$163.P$1
S$161: E$9.P$1 E$154.P$2 E$155.P$1 E$158.P$1 E$159.P$1
S$162: E$9.P$2 E$147.P$2
S$163: E$22.9 E$55.P$25
S$164: E$22.10 E$55.P$12
S$165: E$22.11 E$51.P$7
S$166: E$22.12 E$51.P$14
S$167: E$8.13 E$22.7
S$168: E$8.12 E$22.8
S$169: E$7.P$3 E$11.P$1
S$170: E$7.P$6 E$176.P$2
S$171: E$7.P$9 E$41.P$1 E$176.P$1 E$180.P$1
S$172: E$7.P$11 E$177.P$1
S$173: E$7.P$1 E$11.P$2 E$183.P$1
S$174: E$20.7 E$147.P$1
S$175: E$22.13 E$174.P$2
S$176: E$7.P$8 E$174.P$1
S$177: E$7.P$7 E$174.P$3
S$178: E$22.14 E$174.P$4
S$179: E$22.3 E$166.P$1 E$222.P$2
S$180: E$12.P$1 E$37.3 E$193.P$2 E$196.P$2
S$181: E$36.4 E$37.1 E$37.4 E$200.P$1 E$204.P$1 E$205.P$2 E$206.P$1
S$182: E$43.P$2 E$55.P$9 E$209.P$2
S$183: E$43.P$3 E$55.P$22 E$210.P$2
S$184: E$56.P$2 E$63.P$2
S$185: E$32.3 E$121.P$2 E$122.P$1 E$125.P$1
S$188: E$38.6 E$51.P$24
S$190: E$22.4 E$169.P$1 E$219.P$1
S$191: E$22.5 E$167.P$1 E$219.P$2
S$192: E$41.P$2 E$175.P$1
S$193: E$51.P$18 E$175.P$2
S$194: E$31.1 E$56.P$7 E$109.P$1 E$207.P$1
S$195: E$40.3 E$51.P$2 E$183.P$2 E$184.P$1 E$186.P$1 E$187.P$1
S$196: E$31.6 E$31.8 E$110.P$2 E$112.P$1 E$113.P$1
S$197: E$10.P$3 E$39.3 E$43.P$1 E$97.P$2 E$98.P$2 E$100.P$1 E$103.P$1 E$104.P$2 E$106.P$2 E$110.P$1 E$118.P$1 E$119.P$1 E$120.P$1 E$209.P$1 E$210.P$1
S$198: E$36.6 E$194.P$3 E$195.P$1 E$196.P$1
S$201: E$34.4 E$35.2 E$35.3 E$92.P$1 E$96.P$2
V5: E$20.1 E$20.8 E$23.3 E$24.3 E$36.2 E$38.2 E$131.P$1 E$133.P$2 E$149.P$2 E$151.P$1 E$185.P$1 E$189.P$3 E$192.P$1 E$201.P$1 E$202.P$3 E$217.P$1
V12: E$17.P$1 E$23.1 E$26.P$2 E$64.P$2 E$154.P$1 E$161.P$1 E$164.P$2 E$218.P$1
V24: E$1.P$1 E$5.1 E$6.1 E$9.P$3 E$13.P$2 E$15.P$1 E$18.P$2 E$62.P$2 E$80.P$2
V33: E$16.2 E$16.16 E$16.30 E$16.37 E$16.46 E$16.55 E$16.62 E$16.86 E$22.16 E$24.2 E$24.4 E$25.P$2 E$27.P$1 E$30.8 E$31.7 E$32.5 E$34.5 E$35.8 E$37.5 E$44.P$1 E$45.P$2 E$46.P$1 E$47.P$2 E$48.P$1 E$49.P$1 E$50.P$1 E$51.P$5 E$51.P$11 E$51.P$20 E$53.P$18 E$53.P$25 E$54.P$1 E$55.P$11 E$55.P$20 E$56.P$8 E$57.P$5 E$57.P$11 E$57.P$20 E$58.P$11 E$58.P$20 E$59.P$8 E$60.P$2 E$90.P$1 E$91.P$1 E$93.P$1 E$95.P$1 E$96.P$1 E$115.P$1 E$116.P$1 E$123.P$1 E$127.P$1 E$130.P$1 E$132.P$1 E$135.P$1 E$137.P$2 E$138.P$1 E$139.P$1 E$148.P$1 E$152.P$1 E$172.P$1 E$173.P$1 E$198.P$1 E$199.P$2 E$211.P$1 E$213.P$1 E$215.P$2